# Altium PCB KeypadPCB.PcbDoc
Units mil, origin at the board's own origin, x right, y up, seen from the top; angles counter-clockwise.
Board outline 5000 x 3000 mil, 2 copper layers (Top Layer, Bottom Layer); 148 components, 80 nets, 508 pads, 47 vias.
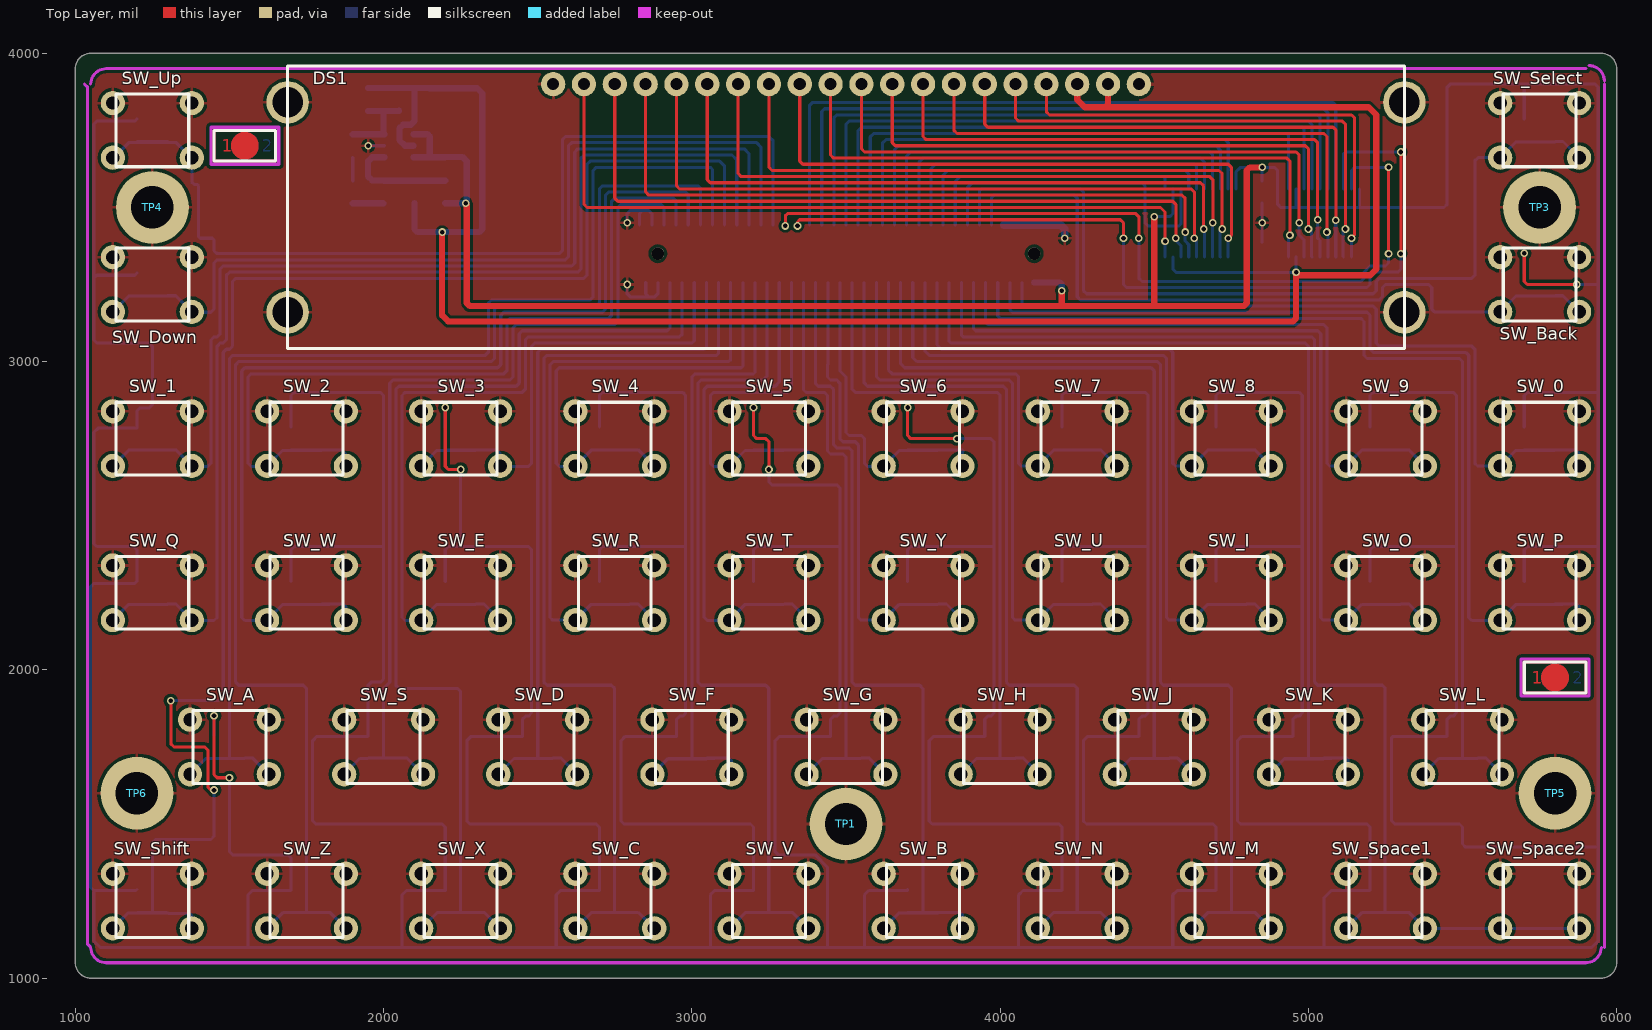
[diagram p0: Top Layer view]
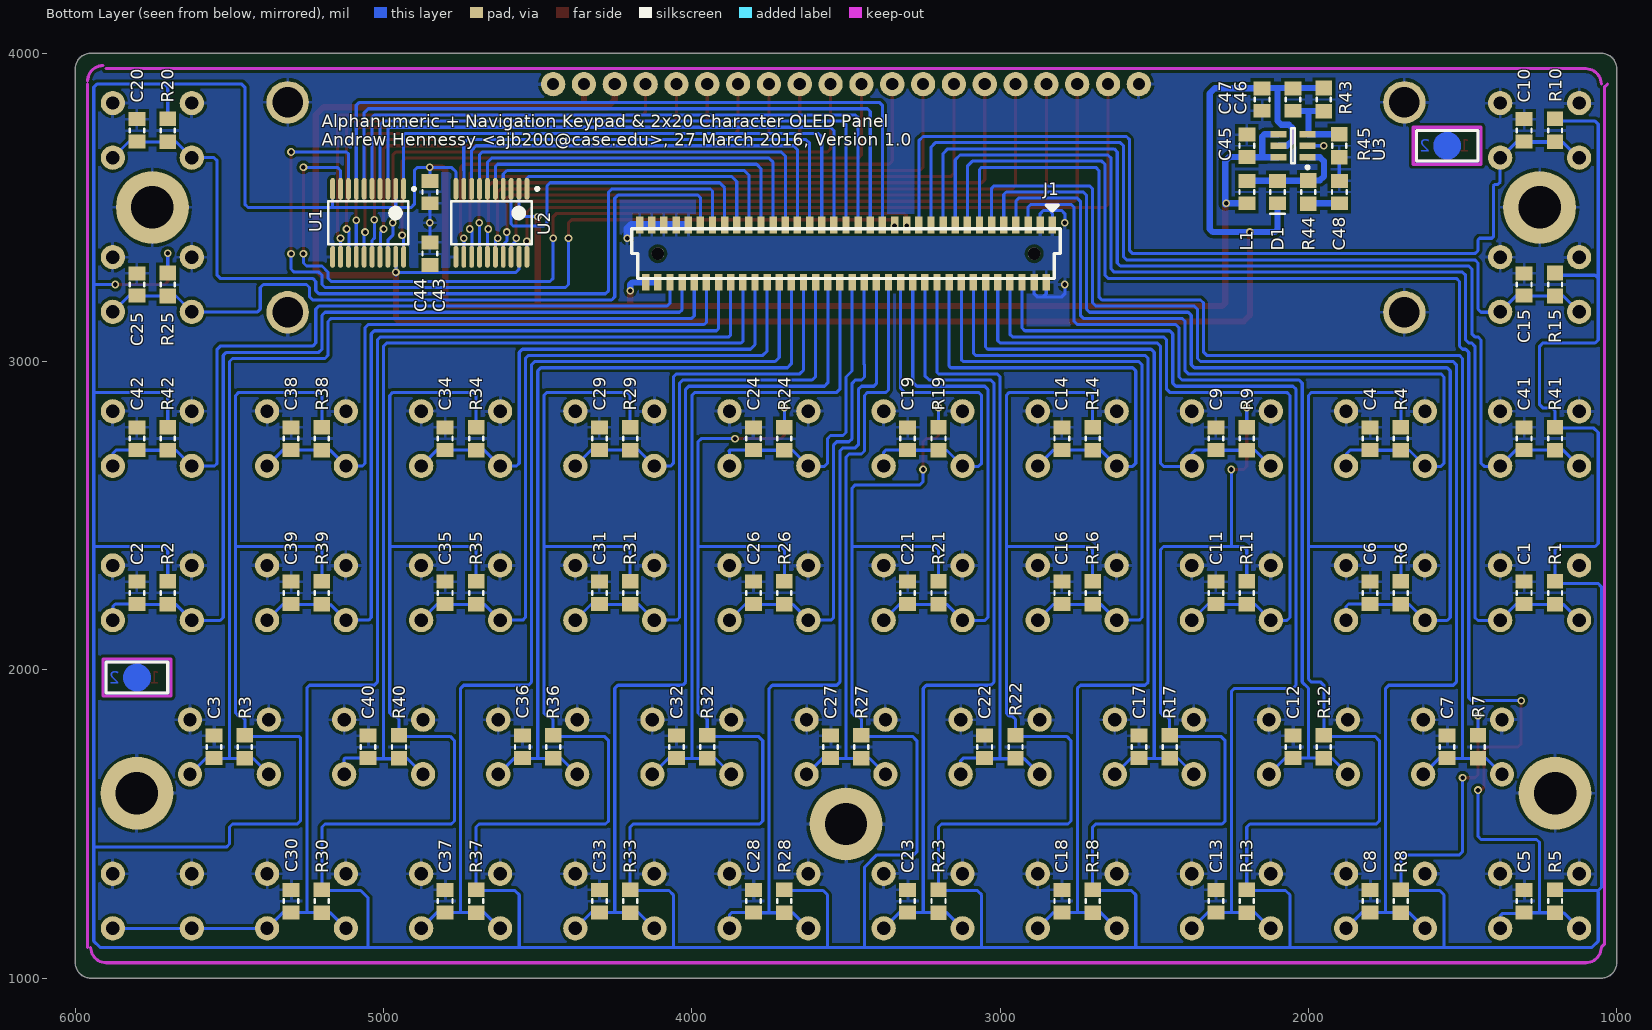
[diagram p1: Bottom Layer view, seen from below]

## Layer stack, top to bottom
Top Solder: solder mask 0.4, Solder Resist, Dk 3.5
Top Layer: signal copper 1.4
Dielectric 1: dielectric 12.6, FR-4, Dk 4.8
Bottom Layer: signal copper 1.4
Bottom Solder: solder mask 0.4, Solder Resist, Dk 3.5

## Board outline
1050,1000 cw(c1050,1050) 1000,1050 1000,3950 cw(c1050,3950) 1050,4000 5950,4000 cw(c5950,3950) 6000,3950 6000,1050 cw(c5950,1050) 5950,1000

## Design rules (kind name [scope] priority, off if disabled: settings)
Clearance [All] p1: gap=10
PolygonConnect [All] p1: connectstyle=Relief reliefconductorwidth=10 reliefentries=4 polygonreliefangle="90 Angle" airgapwidth=10
RoutingVias [All] p1: holewidth=28 width=25 viastyle="Through Hole" minholewidth=15 minwidth=25 maxholewidth=15 maxwidth=50
SolderMaskExpansion [All] p1: expansion=4
Width [All] p1: maxlimit=30 minlimit=8 preferedwidth=10 minimp=50.000000 maximp=50.000000 favimp=50.000000
30 further rules are at their usual default settings.

## Components (designator, comment, footprint, x,y, rotation, side; value= is the part's Value field where it differs from the comment)
C1 "1µF" C0805(2012)_NP_med 1300,2250 r270 bottom
C2 "1µF" C0805(2012)_NP_med 5800,2250 r270 bottom
C3 "1µF" C0805(2012)_NP_med 5550,1750 r270 bottom
C4 "1µF" C0805(2012)_NP_med 1800,2750 r270 bottom
C5 "1µF" C0805(2012)_NP_med 1300,1250 r90 bottom
C6 "1µF" C0805(2012)_NP_med 1800,2250 r270 bottom
C7 "1µF" C0805(2012)_NP_med 1550,1750 r270 bottom
C8 "1µF" C0805(2012)_NP_med 1800,1250 r270 bottom
C9 "1µF" C0805(2012)_NP_med 2300,2750 r270 bottom
C10 "1µF" C0805(2012)_NP_med 1300,3750 r270 bottom
C11 "1µF" C0805(2012)_NP_med 2300,2250 r270 bottom
C12 "1µF" C0805(2012)_NP_med 2050,1750 r270 bottom
C13 "1µF" C0805(2012)_NP_med 2300,1250 r270 bottom
C14 "1µF" C0805(2012)_NP_med 2800,2750 r270 bottom
C15 "1µF" C0805(2012)_NP_med 1300,3250 r270 bottom
C16 "1µF" C0805(2012)_NP_med 2800,2250 r270 bottom
C17 "1µF" C0805(2012)_NP_med 2550,1750 r270 bottom
C18 "1µF" C0805(2012)_NP_med 2800,1250 r270 bottom
C19 "1µF" C0805(2012)_NP_med 3300,2750 r270 bottom
C20 "1µF" C0805(2012)_NP_med 5800,3750 r270 bottom
C21 "1µF" C0805(2012)_NP_med 3300,2250 r270 bottom
C22 "1µF" C0805(2012)_NP_med 3050,1750 r270 bottom
C23 "1µF" C0805(2012)_NP_med 3300,1250 r270 bottom
C24 "1µF" C0805(2012)_NP_med 3800,2750 r270 bottom
C25 "1µF" C0805(2012)_NP_med 5800,3250 r270 bottom
C26 "1µF" C0805(2012)_NP_med 3800,2250 r270 bottom
C27 "1µF" C0805(2012)_NP_med 3550,1750 r270 bottom
C28 "1µF" C0805(2012)_NP_med 3800,1250 r270 bottom
C29 "1µF" C0805(2012)_NP_med 4300,2750 r270 bottom
C30 "1µF" C0805(2012)_NP_med 5300,1250 r90 bottom
C31 "1µF" C0805(2012)_NP_med 4300,2250 r270 bottom
C32 "1µF" C0805(2012)_NP_med 4050,1750 r270 bottom
C33 "1µF" C0805(2012)_NP_med 4300,1250 r270 bottom
C34 "1µF" C0805(2012)_NP_med 4800,2750 r270 bottom
C35 "1µF" C0805(2012)_NP_med 4800,2250 r270 bottom
C36 "1µF" C0805(2012)_NP_med 4550,1750 r270 bottom
C37 "1µF" C0805(2012)_NP_med 4800,1250 r270 bottom
C38 "1µF" C0805(2012)_NP_med 5300,2750 r270 bottom
C39 "1µF" C0805(2012)_NP_med 5300,2250 r270 bottom
C40 "1µF" C0805(2012)_NP_med 5050,1750 r270 bottom
C41 "1µF" C0805(2012)_NP_med 1300,2750 r270 bottom
C42 "1µF" C0805(2012)_NP_med 5800,2750 r270 bottom
C43 "0.1µF" C0805(2012)_NP_med 4850,3550 r270 bottom
C44 "0.1µF" C0805(2012)_NP_med 4850,3350 r90 bottom
C45 "4.7µF" C0805(2012)_NP_med 2200,3700 r90 bottom
C46 "100pF" C0805(2012)_NP_med 2050,3850 r270 bottom
C47 "4.7µF" C0805(2012)_NP_med 2150,3850 r270 bottom
C48 "1nF" C0805(2012)_NP_med 1900,3550 r270 bottom
D1 "SD0805S020S1R0" C0805(2012)_P_med 2100,3550 r90 bottom
DS1 "NHD-0220CW-AG3" "Newhaven NHD-0220CW-AG3" 3500,3900 r0 top locked
J1 "BKS-169-01-L-V-A" "SAMTEC BKS-169-01-L-V-A" 3500,3350 r0 bottom locked
L1 "4.7µH" C0805(2012)_NP_med 2200,3550 r90 bottom
R1 "10kΩ" R0805(2012)_med 1200,2250 r270 bottom
R2 "10kΩ" R0805(2012)_med 5700,2250 r270 bottom
R3 "10kΩ" R0805(2012)_med 5450,1750 r270 bottom
R4 "10kΩ" R0805(2012)_med 1700,2750 r270 bottom
R5 "10kΩ" R0805(2012)_med 1200,1250 r90 bottom
R6 "10kΩ" R0805(2012)_med 1700,2250 r270 bottom
R7 "10kΩ" R0805(2012)_med 1450,1750 r270 bottom
R8 "10kΩ" R0805(2012)_med 1700,1250 r270 bottom
R9 "10kΩ" R0805(2012)_med 2200,2750 r270 bottom
R10 "10kΩ" R0805(2012)_med 1200,3750 r270 bottom
R11 "10kΩ" R0805(2012)_med 2200,2250 r270 bottom
R12 "10kΩ" R0805(2012)_med 1950,1750 r270 bottom
R13 "10kΩ" R0805(2012)_med 2200,1250 r270 bottom
R14 "10kΩ" R0805(2012)_med 2700,2750 r270 bottom
R15 "10kΩ" R0805(2012)_med 1200,3250 r270 bottom
R16 "10kΩ" R0805(2012)_med 2700,2250 r270 bottom
R17 "10kΩ" R0805(2012)_med 2450,1750 r270 bottom
R18 "10kΩ" R0805(2012)_med 2700,1250 r270 bottom
R19 "10kΩ" R0805(2012)_med 3200,2750 r270 bottom
R20 "10kΩ" R0805(2012)_med 5700,3750 r270 bottom
R21 "10kΩ" R0805(2012)_med 3200,2250 r270 bottom
R22 "10kΩ" R0805(2012)_med 2950,1750 r270 bottom
R23 "10kΩ" R0805(2012)_med 3200,1250 r270 bottom
R24 "10kΩ" R0805(2012)_med 3700,2750 r270 bottom
R25 "10kΩ" R0805(2012)_med 5700,3250 r270 bottom
R26 "10kΩ" R0805(2012)_med 3700,2250 r270 bottom
R27 "10kΩ" R0805(2012)_med 3450,1750 r270 bottom
R28 "10kΩ" R0805(2012)_med 3700,1250 r270 bottom
R29 "10kΩ" R0805(2012)_med 4200,2750 r270 bottom
R30 "10kΩ" R0805(2012)_med 5200,1250 r270 bottom
R31 "10kΩ" R0805(2012)_med 4200,2250 r270 bottom
R32 "10kΩ" R0805(2012)_med 3950,1750 r270 bottom
R33 "10kΩ" R0805(2012)_med 4200,1250 r270 bottom
R34 "10kΩ" R0805(2012)_med 4700,2750 r270 bottom
R35 "10kΩ" R0805(2012)_med 4700,2250 r270 bottom
R36 "10kΩ" R0805(2012)_med 4450,1750 r270 bottom
R37 "10kΩ" R0805(2012)_med 4700,1250 r270 bottom
R38 "10kΩ" R0805(2012)_med 5200,2750 r270 bottom
R39 "10kΩ" R0805(2012)_med 5200,2250 r270 bottom
R40 "10kΩ" R0805(2012)_med 4950,1750 r270 bottom
R41 "10kΩ" R0805(2012)_med 1200,2750 r270 bottom
R42 "10kΩ" R0805(2012)_med 5700,2750 r270 bottom
R43 "1.02MΩ" R0805(2012)_med 1950,3850 r270 bottom
R44 "2Ω" R0805(2012)_med 2000,3550 r270 bottom
R45 "332kΩ" R0805(2012)_med 1900,3700 r270 bottom
SW_0 "TE 1825910-6" "TE 1825910-6" 5750,2750 r0 top locked
SW_1 "1825910-6" "TE 1825910-6" 1250,2750 r0 top locked
SW_2 "1825910-6" "TE 1825910-6" 1750,2750 r0 top locked
SW_3 "1825910-6" "TE 1825910-6" 2250,2750 r0 top locked
SW_4 "1825910-6" "TE 1825910-6" 2750,2750 r0 top locked
SW_5 "1825910-6" "TE 1825910-6" 3250,2750 r0 top locked
SW_6 "1825910-6" "TE 1825910-6" 3750,2750 r0 top locked
SW_7 "1825910-6" "TE 1825910-6" 4250,2750 r0 top locked
SW_8 "1825910-6" "TE 1825910-6" 4750,2750 r0 top locked
SW_9 "1825910-6" "TE 1825910-6" 5250,2750 r0 top locked
SW_A "1825910-6" "TE 1825910-6" 1500,1750 r0 top locked
SW_B "1825910-6" "TE 1825910-6" 3750,1250 r0 top locked
SW_Back "1825910-6" "TE 1825910-6" 5750,3250 r0 top locked
SW_C "1825910-6" "TE 1825910-6" 2750,1250 r0 top locked
SW_D "1825910-6" "TE 1825910-6" 2500,1750 r0 top locked
SW_Down "1825910-6" "TE 1825910-6" 1250,3250 r0 top locked
SW_E "1825910-6" "TE 1825910-6" 2250,2250 r0 top locked
SW_F "1825910-6" "TE 1825910-6" 3000,1750 r0 top locked
SW_G "1825910-6" "TE 1825910-6" 3500,1750 r0 top locked
SW_H "1825910-6" "TE 1825910-6" 4000,1750 r0 top locked
SW_I "1825910-6" "TE 1825910-6" 4750,2250 r0 top locked
SW_J "1825910-6" "TE 1825910-6" 4500,1750 r0 top locked
SW_K "1825910-6" "TE 1825910-6" 5000,1750 r0 top locked
SW_L "1825910-6" "TE 1825910-6" 5500,1750 r0 top locked
SW_M "1825910-6" "TE 1825910-6" 4750,1250 r0 top locked
SW_N "1825910-6" "TE 1825910-6" 4250,1250 r0 top locked
SW_O "1825910-6" "TE 1825910-6" 5250,2250 r0 top locked
SW_P "1825910-6" "TE 1825910-6" 5750,2250 r0 top locked
SW_Q "1825910-6" "TE 1825910-6" 1250,2250 r0 top locked
SW_R "1825910-6" "TE 1825910-6" 2750,2250 r0 top locked
SW_S "1825910-6" "TE 1825910-6" 2000,1750 r0 top locked
SW_Select "1825910-6" "TE 1825910-6" 5750,3750 r0 top locked
SW_Shift "1825910-6" "TE 1825910-6" 1250,1250 r0 top locked
SW_Space1 "1825910-6" "TE 1825910-6" 5250,1250 r0 top locked
SW_Space2 "1825910-6" "TE 1825910-6" 5750,1250 r0 top locked
SW_T "1825910-6" "TE 1825910-6" 3250,2250 r0 top locked
SW_U "1825910-6" "TE 1825910-6" 4250,2250 r0 top locked
SW_Up "1825910-6" "TE 1825910-6" 1250,3750 r0 top locked
SW_V "1825910-6" "TE 1825910-6" 3250,1250 r0 top locked
SW_W "1825910-6" "TE 1825910-6" 1750,2250 r0 top locked
SW_X "1825910-6" "TE 1825910-6" 2250,1250 r0 top locked
SW_Y "1825910-6" "TE 1825910-6" 3750,2250 r0 top locked
SW_Z "1825910-6" "TE 1825910-6" 1750,1250 r0 top locked
TP1 "Testpoint" "M3x0.5 Hole" 3500,1500 r0 top
TP3 "Testpoint" "M3x0.5 Hole" 5750,3500 r0 top
TP4 "Testpoint" "M3x0.5 Hole" 1250,3500 r0 top
TP5 "Testpoint" "M3x0.5 Hole" 5800,1600 r0 top
TP6 "Testpoint" "M3x0.5 Hole" 1200,1600 r0 top
U1 "TXB0108PWR" "TI 20 Pin PW (R-PDSO-G20)" 5050,3450 r270 bottom locked
U2 "TXB0108PWR" "TI 20 Pin PW (R-PDSO-G20)" 4650,3450 r270 bottom locked
U3 "LTC3400BES6#TRMPBF" LT-S6-6-TSOT-23_N 2050,3700 r0 bottom

## Footprints (in the part's own frame and the unit in brackets; to place one, negate y for a bottom-side part, rotate by r counter-clockwise, add the part's x,y. Pads: shape width x height; smd on the part's side, far side on the other; paste and mask are expansions set on the pad)
C0805(2012)_NP_med [mm] "Chip Capacitor, 2-Leads, Body 2.0x1.3mm, IPC Medium Density"
  rect 1.15x1.4 smd: 1(-0.925,0) 2(0.925,0)
  silkscreen extent -0.15,-0.6 0.15,0.6, body extent -1.1,-0.67 1.1,0.67, height 0.7
C0805(2012)_P_med [mm] "Chip Capacitor, 2-Leads, Body 2.0x1.3mm, IPC Medium Density"
  rect 1.15x1.4 smd: 1(-0.925,0) 2(0.925,0)
  silkscreen extent -1.8,-0.6 0.15,0.6, body extent -1.1,-0.67 1.1,0.67, height 0.7
LT-S6-6-TSOT-23_N [mm] "SOT23, 6-Leads, Body 2.9x1.75mm, Pitch 0.95mm, IPC Medium Density"
  rect 1.3x0.55 smd: 1(-1.2,0.95) 2(-1.2,0) 3(-1.2,-0.95) 4(1.2,-0.95) 5(1.2,0) 6(1.2,0.95)
  silkscreen extent -1.32,-1.45 0.15,1.9, body extent -0.87,-1.45 0.87,1.45, height 1
"M3x0.5 Hole" [mm] "A hole"
  round 6 hole 3.5: 1(0,0)
"Newhaven NHD-0220CW-AG3" [mm] "Slim Character OLED. 2 lines x 20 character Green OLED display. 2.8V or 5V power. 4/8-bit Parallel, SPI, or I2C MPU interface. 3 built-in font tables. Double height characters."
  round 2 hole 1: 1(24.13,0) 2(21.59,0) 3(19.05,0) 4(16.51,0) 5(13.97,0) 6(11.43,0) 7(8.89,0) 8(6.35,0) 9(3.81,0) 10(1.27,0) 11(-1.27,0) 12(-3.81,0) 13(-6.35,0) 14(-8.89,0) 15(-11.43,0) 16(-13.97,0) 17(-16.51,0) 18(-19.05,0) 19(-21.59,0) 20(-24.13,0)
  round 3.5 hole 2.5: MH1(-46,-1.5) MH2(46,-1.5) MH3(-46,-18.8) MH4(46,-18.8)
  silkscreen extent -46,-21.8 46,1.5, body extent -45.72,-21.59 45.72,1.27, height 10
R0805(2012)_med [mm] "Chip Resistor, 2-Leads, Body 2.0x1.3mm, IPC Medium Density"
  rect 1.2x1.35 smd: 1(-0.95,0) 2(0.95,0)
  silkscreen extent -0.15,-0.58 0.15,0.58, body extent -1.1,-0.67 1.1,0.67, height 0.7
"SAMTEC BKS-169-01-L-V-A" [mm] "Polarized Micro Socket"
  rect 0.61x1.375 smd: 1(-17,-2.362) 2(-16.5,2.362) 3(-16,-2.362) 4(-15.5,2.362) 5(-15,-2.362) 6(-14.5,2.362) 7(-14,-2.362) 8(-13.5,2.362) 9(-13,-2.362) 10(-12.5,2.362) 11(-12,-2.362) 12(-11.5,2.362) 13(-11,-2.362) 14(-10.5,2.362) 15(-10,-2.362) 16(-9.5,2.362) 17(-9,-2.362) 18(-8.5,2.362) 19(-8,-2.362) 20(-7.5,2.362) 21(-7,-2.362) 22(-6.5,2.362) 23(-6,-2.362) 24(-5.5,2.362) 25(-5,-2.362) 26(-4.5,2.362) 27(-4,-2.362) 28(-3.5,2.362) 29(-3,-2.362) 30(-2.5,2.362) 31(-2,-2.362) 32(-1.5,2.362) 33(-1,-2.362) 34(-0.5,2.362) 35(0,-2.362) 36(0.5,2.362) 37(1,-2.362) 38(1.5,2.362) 39(2,-2.362) 40(2.5,2.362) 41(3,-2.362) 42(3.5,2.362) 43(4,-2.362) 44(4.5,2.362) 45(5,-2.362) 46(5.5,2.362) 47(6,-2.362) 48(6.5,2.362) 49(7,-2.362) 50(7.5,2.362) 51(8,-2.362) 52(8.5,2.362) 53(9,-2.362) 54(9.5,2.362) 55(10,-2.362) 56(10.5,2.362) 57(11,-2.362) 58(11.5,2.362) 59(12,-2.362) 60(12.5,2.362) 61(13,-2.362) 62(13.5,2.362) 63(14,-2.362) 64(14.5,2.362) 65(15,-2.362) 66(15.5,2.362) 67(16,-2.362) 68(16.5,2.362) 69(17,-2.362)
  round 1.02 hole 1.02 unplated: AH1(-15.5,0) AH2(15.5,0)
  silkscreen extent -17.65,-4 17.65,2.05, body extent -17.67,-2.79 17.67,2.79, height 2.22
"TE 1825910-6" [mm] "SWITCH TACTILE SPST-NO 0.05A 24V"
  round 2 hole 1.1: 1(-3.25,2.25) 2(3.25,2.25) 3(-3.25,-2.25) 4(3.25,-2.25)
  silkscreen extent -3,-3 3,3, body extent -3.05,-3.05 3.05,3, height 4.98
"TI 20 Pin PW (R-PDSO-G20)" [mm] "Texas Instruments 20 Pin PW Package (0.65mm pitch, 4.4mm width,"
  oval 1.8x0.4 smd: 1(-2.8,2.921) 2(-2.8,2.271) 3(-2.8,1.621) 4(-2.8,0.971) 5(-2.8,0.321) 6(-2.8,-0.329) 7(-2.8,-0.979) 8(-2.8,-1.629) 9(-2.8,-2.279) 10(-2.8,-2.929) 11(2.8,-2.929) 12(2.8,-2.279) 13(2.8,-1.629) 14(2.8,-0.979) 15(2.8,-0.329) 16(2.8,0.321) 17(2.8,0.971) 18(2.8,1.621) 19(2.8,2.271) 20(2.8,2.921)
  silkscreen extent -2.92,-3.3 1.78,3.9, body extent -2.21,-3.25 2.21,3.25, height 1.2

## Part data
C1 C2 C3 C4 C5 C6 C7 C8 C9 C10 C11 C12 C13 C14 C15 C16 C17 C18 C19 C20 C21 C22 C23 C24 C25 C26 C27 C28 C29 C30 C31 C32 C33 C34 C35 C36 C37 C38 C39 C40 C41 C42 C43 C44 C45 C46 C47 C48: library part CPN_SMT, "SMT Capacitor"
D1: library part DIODE_sMT, "SMT LED"
DS1: library part "NewHaven NHD-0220CW-AG3", "Slim Character OLED. 2 lines x 20 character Green OLED display. 2.8V or 5V power. 4/8-bit Parallel, SPI, or I2C MPU interface. 3 built-in font tables. Double height characters."
J1: library part "Samtec BKS-169-01-L-V-A", "CONN HDR 69POS 1MM SMD GLD"
L1: library part IND_SMT, "SMT Inductor"
R1 R2 R3 R4 R5 R6 R7 R8 R9 R10 R11 R12 R13 R14 R15 R16 R17 R18 R19 R20 R21 R22 R23 R24 R25 R26 R27 R28 R29 R30 R31 R32 R33 R34 R35 R36 R37 R38 R39 R40 R41 R42 R43 R44 R45: library part RES_SMT, "SMT resistor"
SW_0 SW_1 SW_2 SW_3 SW_4 SW_5 SW_6 SW_7 SW_8 SW_9 SW_A SW_B SW_Back SW_C SW_D SW_Down SW_E SW_F SW_G SW_H SW_I SW_J SW_K SW_L SW_M SW_N SW_O SW_P SW_Q SW_R SW_S SW_Select SW_Shift SW_Space1 SW_Space2 SW_T SW_U SW_Up SW_V SW_W SW_X SW_Y SW_Z: "SWITCH TACTILE SPST-NO 0.05A 24V"
U1 U2: library part "TI TXB0108PWR", "IC 8-BIT TRNSTR 15KV ESD 20TSSOP"
U3: "600 mA, 1.2 MHz Micropower Synchronous Boost Converter, 6-pin SOT23 (S6-6), -30 to 85 degC, Pb-Free, Mini Tape and Reel"

## Via types
v1: diameter 25, hole 15, Top Layer to Bottom Layer, tented both sides, 47 vias

## Nets (pads, with @x,y where several pads share a name; then routed paths per layer and width w, separated by ;. In a path a pad name is that pad's centre, name@x,y a point inside that pad or via, vN(x,y) a via of type N, cw(c..) or ccw(c..) an arc to the next point about the centre after c; other vN are vias at no path point)
+3V3: C43.1 C45.1 J1.66 J1.68 L1.1 R1.1 R2.1 R3.1 R4.1 R5.2 R6.1 R7.1 R8.1 R9.1 R10.1 R11.1 R12.1 R13.1 R14.1 R15.1 R16.1 R17.1 R18.1 R19.1 R20.1 R21.1 R22.1 R23.1 R24.1 R25.1 R26.1 R27.1 R28.1 R29.1 R30.1 R31.1 R32.1 R33.1 R34.1 R35.1 R36.1 R37.1 R38.1 R39.1 R40.1 R41.1 R42.1 U1.2 U1.10 U2.2 U2.10 U3.4 U3.6 | length 45803.9
  Top Layer w10: v1(1450,1850.98) 1450,1660 1460,1650 v1(1500,1650) ; v1(2200,2850.98) 2200,2660 2210,2650 v1(2250,2650) ; v1(3200,2850.98) 3200,2760 3210,2750 3240,2750 3250,2740 v1(3250,2650) ; v1(3700,2850.98) 3700,2760 3710,2750 v1(3860,2750) ; v1(5700,3350.98) 5700,3260 5710,3250 v1(5870,3250)
  Top Layer w20: v1@2270,3510 2270,3190 2280,3180 4200,3180 ; v1(4200,3230) 4200,3180 ; v1(4500,3470) 4500,3180 ; v1(4850,3630) 4810,3630 4800,3620 4800,3190 4790,3180 4500,3180 ; 4200,3180 4500,3180
  Bottom Layer w10: 1060,1280 1060,1120 1080,1100 1560,1100 ; R5.2 1196.81,1284.21 1060,1284.21 1050,1294.21 1050,2270 1060,2280 1192.6,2280 R1.1 1200,2390 1190,2400 1070,2400 1060,2410 1060,2770 1074.21,2784.21 1200,2784.21 R41.1 1200,2840 1210,2850 1240,2850 1250,2860 1250,3050 1240,3060 1070,3060 1060,3070 1060,3270 ; R15.1 1192.6,3280 1070,3280 1060,3270 ; R10.1 1192.6,3780 1070,3780 1060,3770 1060,3270 ; R7.1 v1(1450,1850.98) ; v1(1500,1650) 1500,1410 1510,1400 1690,1400 1700,1390 R8.1 1700,1284.21 1574.21,1284.21 1560,1270 1560,1100 ; R6.1 1700,2390 1710,2400 2000,2400 ; R4.1 1700,2890 1710,2900 1990,2900 2000,2890 2000,2400 ; R11.1 2200,2390 2210,2400 2250,2400 ; R9.1 v1(2200,2850.98) ; v1(2250,2650) 2250,2400 ; R16.1 2700,2390 2710,2400 2980,2400 ; R14.1 2700,2890 2710,2900 2970,2900 2980,2890 2980,2400 ; R21.1 3200,2390 3210,2400 3480,2400 ; R19.1 v1(3200,2850.98) ; v1(3250,2650) 3250,2610 3260,2600 3470,2600 3480,2590 3480,2400 ; R28.1 3700,1284.21 3574.21,1284.21 3560,1270 3560,1100 ; R26.1 3700,2390 3710,2400 3980,2400 ; R24.1 v1(3700,2850.98) ; v1(3860,2750) 3970,2750 3980,2740 3980,2400 ; R31.1 4200,2390 4210,2400 4480,2400 ; R29.1 4200,2890 4210,2900 4470,2900 4480,2890 4480,2400 ; v1(4500,3470) 4550,3470 4560.59,3480.59 U2.2 ; R35.1 4700,2390 4710,2400 4980,2400 ; R34.1 4700,2890 4710,2900 4970,2900 4980,2890 4980,2400 ; U2.10 4765.32,3615.32 4780,3630 v1(4850,3630) ; C43.1 v1(4850,3630) ; U1.2 4960.59,3500.59 4960,3500 ; U1.10 5165.32,3504.68 5170,3500 ; R39.1 5200,2390 5210,2400 5480,2400 ; R38.1 5200,2890 5210,2900 5470,2900 5480,2890 5480,2400 ; R2.1 5700,2390 5710,2400 5940,2400 ; R42.1 5700,2890 5710,2900 5940,2900 ; R25.1 v1(5700,3350.98) ; R20.1 5700,3890 5710,3900 ; v1(5870,3250) 5940,3250 ; 1560,1100 2060,1100 ; 2000,2400 2000,1970 1990,1960 1960,1960 1950,1950 R12.1 1950,1784.21 1784.21,1784.21 1770,1770 1770,1510 1780,1500 2190,1500 2200,1490 R13.1 2200,1284.21 2074.21,1284.21 2060,1270 2060,1100 ; 2060,1100 2560,1100 ; 2250,2400 2470,2400 2480,2390 2480,1860 2470,1850 2460.49,1850 2450,1839.51 R17.1 2450,1784.21 2284.21,1784.21 2270,1770 2270,1510 2280,1500 2690,1500 2700,1490 R18.1 2700,1284.21 2574.21,1284.21 2560,1270 2560,1100 ; 2560,1100 3060,1100 ; 2980,2400 2980,1860 2970,1850 2960.49,1850 2950,1839.51 R22.1 2950,1784.21 2784.21,1784.21 2770,1770 2770,1510 2780,1500 3190,1500 3200,1490 R23.1 3200,1284.21 3074.21,1284.21 3060,1270 3060,1100 ; 3060,1100 3440,1100 ; 3440,1100 3560,1100 ; 3440,1100 3440,1360 3400,1400 3280,1400 3270,1410 3270,1770 3284.21,1784.21 3450,1784.21 R27.1 3450,1840 3460,1850 3470,1850 3480,1860 3480,2400 ; 3560,1100 4060,1100 ; 3980,2400 3980,1860 3970,1850 3960,1850 3950,1840 R32.1 3950,1784.21 3784.21,1784.21 3770,1770 3770,1510 3780,1500 4190,1500 4200,1490 R33.1 4200,1284.21 4074.21,1284.21 4060,1270 4060,1100 ; 4060,1100 4560,1100 ; 4480,2400 4480,1860 4470,1850 4460.49,1850 4450,1839.51 R36.1 4450,1784.21 4284.21,1784.21 4270,1770 4270,1510 4280,1500 4690,1500 4700,1490 R37.1 4700,1284.21 4574.21,1284.21 4560,1270 4560,1100 ; 4560,1100 5050,1100 ; v1(4850,3630) 4890,3630 4900,3620 4900,3510 4910,3500 4960,3500 ; 4960,3500 5170,3500 ; 4980,2400 4980,1860 4970,1850 4960,1850 4950,1840 R40.1 4950,1784.21 4784.21,1784.21 4770,1770 4770,1510 4780,1500 5190,1500 5200,1490 R30.1 5200,1284.21 5074.21,1284.21 5050,1260 5050,1100 ; 5050,1100 5920,1100 5940,1120 5940,1425 ; 5170,3500 5440,3500 5450,3510 5450,3890 5460,3900 5710,3900 ; 5480,2400 5480,1860 5470,1850 5460,1850 5450,1840 R3.1 5450,1784.21 5274.21,1784.21 5270,1780 5270,1510 5280,1500 5490,1500 5500,1490 5500,1435 5510,1425 5940,1425 ; 5710,3900 5930,3900 5940,3890 5940,3250 ; 5940,1425 5940,2400 ; 5940,2400 5940,2900 ; 5940,2900 5940,3250
  Bottom Layer w20: U3.6 2148.13,3662.6 ; U3.4 2142.6,3737.4 2150,3730 2150,3664.47 2148.13,3662.6 ; L1.1 v1(2266.42,3513.58) 2270,3510 2270,3650 2256.42,3663.58 C45.1 2199.02,3662.6 2148.13,3662.6 ; J1.66 4193.01,3256.99 4200,3250 v1(4200,3230)
+5V: C44.1 C46.1 C47.1 D1.1 DS1.2 DS1.3 R43.1 U1.19 U2.19 U3.5 | length 6974.3
  Top Layer w20: v1(2190,3420) 2190,3150 2210,3130 4950,3130 4960,3140 4960,3280 5200,3280 5220,3300 5220,3800 5195,3825 4340,3825 ; DS1.3 4250,3850 4275,3825 4340,3825 ; DS1.2 4350,3835 4340,3825
  Bottom Layer w10: U2.19 4560.59,3299.41 4570.67,3289.33 4950.67,3289.33 4960,3280 v1(4960,3290) 4960,3339.17 U1.19
  Bottom Layer w20: R43.1 2100,3887.4 ; U3.5 2069.94,3700 2051.65,3718.29 2051.65,3756.51 2063.37,3768.23 2088.23,3768.23 2100,3780 2100,3887.4 ; D1.1 2100,3430 2110,3420 v1(2190,3420) 2310,3420 2320,3430 2320,3870 2303.58,3886.42 C47.1 2149.02,3887.4 2100,3887.4
GND: C1.1 C2.1 C3.1 C4.1 C5.2 C6.1 C7.1 C8.1 C9.1 C10.1 C11.1 C12.1 C13.1 C14.1 C15.1 C16.1 C17.1 C18.1 C19.1 C20.1 C21.1 C22.1 C23.1 C24.1 C25.1 C26.1 C27.1 C28.1 C29.1 C30.2 C31.1 C32.1 C33.1 C34.1 C35.1 C36.1 C37.1 C38.1 C39.1 C40.1 C41.1 C42.1 C43.2 C44.2 C45.2 C47.2 C48.1 DS1.1 DS1.20 DS1.MH1 DS1.MH2 DS1.MH3 DS1.MH4 J1.1 J1.2 J1.3 J1.4 J1.61 J1.63 J1.65 J1.67 J1.69 R45.2 SW_0.1 SW_0.2 SW_1.1 SW_1.2 SW_2.1 SW_2.2 SW_3.1 SW_3.2 SW_4.1 SW_4.2 SW_5.1 SW_5.2 SW_6.1 SW_6.2 SW_7.1 SW_7.2 SW_8.1 SW_8.2 SW_9.1 SW_9.2 SW_A.1 SW_A.2 SW_B.1 SW_B.2 SW_Back.1 SW_Back.2 SW_C.1 SW_C.2 SW_D.1 SW_D.2 SW_Down.1 SW_Down.2 SW_E.1 SW_E.2 SW_F.1 SW_F.2 SW_G.1 SW_G.2 SW_H.1 SW_H.2 SW_I.1 SW_I.2 SW_J.1 SW_J.2 SW_K.1 SW_K.2 SW_L.1 SW_L.2 SW_M.1 SW_M.2 SW_N.1 SW_N.2 SW_O.1 SW_O.2 SW_P.1 SW_P.2 SW_Q.1 SW_Q.2 SW_R.1 SW_R.2 SW_S.1 SW_S.2 SW_Select.1 SW_Select.2 SW_Shift.1 SW_Shift.2 SW_Space1.1 SW_Space1.2 SW_Space2.1 SW_Space2.2 SW_T.1 SW_T.2 SW_U.1 SW_U.2 SW_Up.1 SW_Up.2 SW_V.1 SW_V.2 SW_W.1 SW_W.2 SW_X.1 SW_X.2 SW_Y.1 SW_Y.2 SW_Z.1 SW_Z.2 TP1.1 TP3.1 TP4.1 TP5.1 TP6.1 U1.11 U2.11 U3.2 | length 922.9
  Bottom Layer w10: C48.1 R45.2 ; v1(1950,3700) U3.2 ; v1(2790,3250) 2790,3220 2800,3210 2860,3210 ; v1(2790,3450) 2790,3480 2800,3490 2840,3490 ; J1.1 2830,3443.72 2830,3480 2840,3490 ; J1.2 2850.39,3220.39 2850,3220 2860,3210 ; J1.3 2870.08,3479.92 2860,3490 2840,3490 ; J1.4 2889.76,3219.76 2880,3210 2860,3210 ; C44.2 v1(4850,3450) C43.2
  Bottom Layer w25: J1.61 J1.63 J1.65 J1.67 J1.69 4196.99,3443.01 4210,3430 v1(4210,3400)
KEY_0: C42.2 J1.64 R42.2 SW_0.3 SW_0.4 | length 2565.1
  Bottom Layer w10: J1.64 4070.87,3189.13 4080,3180 5210,3180 5220,3170 5220,3060 5230,3050 5530,3050 5540,3040 5540,2670 5548.58,2661.42 SW_0.3 5672.24,2711.61 R42.2@5699.02,2711.61 ; C42.2@5798.03,2711.61 R42.2@5699.02,2711.61 ; C42.2 5866.42,2713.58 5877.95,2702.05 SW_0.4 ; C42.2@5824.8,2712.6 R42.2 R42.2@5699.02,2711.61
KEY_1: C41.2 J1.19 R41.2 SW_1.3 SW_1.4 | length 3339.8
  Bottom Layer w10: SW_1.3 1173.23,2712.6 R41.2 1299.02,2712.6 C41.2 1325.79,2713.58 SW_1.4 1379.37,2660 1430,2660 1440,2670 1440,3070 1450,3080 1460,3080 1470,3090 1470,3300 1480,3310 2610,3310 2620,3320 2620,3680 2630,3690 3170,3690 3185.04,3674.96 J1.19
KEY_2: C4.2 J1.7 R4.2 SW_2.3 SW_2.4 | length 2788
  Bottom Layer w10: C4.2@1798.03,2711.61 R4.2@1699.02,2711.61 ; C4.2@1800,2712.6 R4.2 R4.2@1699.02,2711.61 ; C4.2 1863.58,2713.58 1877.95,2699.21 SW_2.4 ; J1.7 2948.82,3521.18 2940,3530 2750,3530 2740,3520 2740,3150 2730,3140 2410,3140 2400,3130 2400,2970 2390,2960 1570,2960 1560,2950 1560,2670 1570,2660 1620.63,2660 SW_2.3 1672.24,2711.61 R4.2@1699.02,2711.61
KEY_3: C9.2 J1.10 R9.2 SW_3.3 SW_3.4 | length 1632.3
  Bottom Layer w10: SW_3.3 2172.24,2711.61 R9.2@2199.02,2711.61 ; C9.2@2298.03,2711.61 R9.2@2199.02,2711.61 ; J1.10 3007.87,3067.87 3000,3060 2490,3060 2480,3050 2480,2670 2470,2660 2379.37,2660 SW_3.4 2377.95,2702.05 2367.4,2712.6 R9.2 R9.2@2199.02,2711.61
KEY_4: C14.2 J1.18 R14.2 SW_4.3 SW_4.4 | length 1549.2
  Bottom Layer w10: SW_4.4 2825.79,2713.58 C14.2 2799.02,2712.6 R14.2 2673.23,2712.6 SW_4.3 2620.63,2660 2570,2660 2560,2670 2560,2970 2570,2980 3160,2980 3165.35,2985.35 J1.18
KEY_5: C19.2 J1.26 R19.2 SW_5.3 SW_5.4 | length 1327.8
  Bottom Layer w10: C19.2@3298.03,2711.61 R19.2@3199.02,2711.61 ; J1.26 3322.83,2912.83 3310,2900 3070,2900 3060,2890 3060,2670 3070,2660 3120.63,2660 SW_5.3 3172.24,2711.61 R19.2@3199.02,2711.61 ; SW_5.4 3377.95,2705.63 3370,2713.58 C19.2 3300,2712.6 R19.2 R19.2@3199.02,2711.61
KEY_6: C24.2 J1.34 R24.2 SW_6.3 SW_6.4 | length 1140.3
  Bottom Layer w10: J1.34 3480.32,2969.37 3500,2949.69 3500,2770 3510,2760 3550,2760 3560,2750 3560,2670 3570,2660 3620.63,2660 SW_6.3 3672.24,2711.61 R24.2@3699.02,2711.61 ; C24.2@3798.03,2711.61 R24.2@3699.02,2711.61 ; SW_6.4 3877.95,2707.95 3880,2710 3876.42,2713.58 C24.2 3800,2712.6 R24.2 R24.2@3699.02,2711.61
KEY_7: C29.2 J1.42 R29.2 SW_7.3 SW_7.4 | length 1360.9
  Bottom Layer w10: J1.42 3637.8,2972.2 3650,2960 4050,2960 4060,2950 4060,2670 4068.58,2661.42 SW_7.3 4173.23,2712.6 R29.2 4299.02,2712.6 C29.2 4325.79,2713.58 SW_7.4
KEY_8: C34.2 J1.50 R34.2 SW_8.3 SW_8.4 | length 1701.9
  Bottom Layer w10: J1.50 3795.28,3054.72 3810,3040 4550,3040 4560,3030 4560,2670 4568.58,2661.42 SW_8.3 4673.23,2712.6 R34.2 4799.02,2712.6 C34.2 4825.79,2713.58 SW_8.4
KEY_9: C38.2 J1.58 R38.2 SW_9.3 SW_9.4 | length 2048.9
  Bottom Layer w10: J1.58 3952.76,3127.24 3960,3120 5050,3120 5060,3110 5060,2670 5068.58,2661.42 SW_9.3 5173.23,2712.6 R38.2 5299.02,2712.6 C38.2 5325.79,2713.58 SW_9.4
KEY_A: C7.2 J1.13 R7.2 SW_A.3 SW_A.4 | length 3937.1
  Bottom Layer w10: SW_A.3 1423.23,1712.6 R7.2 1500,1712.6 ; SW_A.4 1575.79,1713.58 C7.2 1549.02,1712.6 1500,1712.6 ; J1.13 3066.93,3623.07 3060,3630 2690,3630 2680,3620 2680,3210 2670,3200 2350,3200 2340,3190 2340,3030 2330,3020 1510,3020 1500,3010 1500,1712.6
KEY_B: C28.2 J1.30 R28.2 SW_B.3 SW_B.4 | length 2807.4
  Bottom Layer w10: J1.30 3401.57,2928.43 3410,2920 3450,2920 3460,2910 3460,2730 3470,2720 3510,2720 3520,2710 3520,1960 3530,1950 3739.02,1950 3750,1939.02 3750,1212.6 ; SW_B.3 3672.24,1211.61 R28.2@3699.02,1211.61 ; C28.2@3798.03,1211.61 3750,1211.61 ; C28.2 3870,1213.58 3877.95,1205.63 SW_B.4 ; C28.2@3824.8,1212.6 3750,1212.6 ; R28.2@3699.02,1211.61 3750,1211.61 ; R28.2@3699.02,1211.61 R28.2 3750,1212.6 ; 3750,1211.61 3750,1212.6
KEY_BACK: C25.2 J1.59 R25.2 SW_Back.3 SW_Back.4 | length 2485.6
  Bottom Layer w10: J1.59 3972.44,3532.44 3980,3540 4240,3540 4250,3530 4250,3210 4260,3200 5230,3200 5240,3210 5240,3240 5250,3250 5390,3250 5400,3240 5400,3170 5408.58,3161.42 SW_Back.3 5673.23,3212.6 R25.2 5799.02,3212.6 C25.2 5825.79,3213.58 SW_Back.4
KEY_C: C18.2 J1.14 R18.2 SW_C.3 SW_C.4 | length 3118.2
  Bottom Layer w10: SW_C.3 2673.23,1212.6 R18.2 2749.51,1212.6 ; SW_C.4 2825.79,1213.58 C18.2 2799.02,1212.6 2749.51,1212.6 ; J1.14 3086.61,3026.61 3080,3020 2530,3020 2520,3010 2520,1960 2530,1950 2739.51,1950 2749.51,1940 2749.51,1212.6
KEY_D: C17.2 J1.12 R17.2 SW_D.3 SW_D.4 | length 2380.7
  Bottom Layer w10: SW_D.3 2423.23,1712.6 R17.2 2500,1712.6 ; SW_D.4 2575.79,1713.58 C17.2 2549.02,1712.6 2500,1712.6 ; J1.12 3047.24,3047.24 3040,3040 2510,3040 2500,3030 2500,1712.6
KEY_DOWN: C15.2 J1.21 R15.2 SW_Down.3 SW_Down.4 | length 2931.3
  Bottom Layer w10: SW_Down.3 1173.23,3212.6 R15.2 1299.02,3212.6 C15.2 1325.79,3213.58 SW_Down.4 1379.37,3160 1440,3160 1450,3170 1450,3320 1460,3330 2590,3330 2600,3340 2600,3700 2610,3710 3210,3710 3224.41,3695.59 J1.21
KEY_E: C11.2 J1.8 R11.2 SW_E.3 SW_E.4 | length 2338.8
  Bottom Layer w10: SW_E.4 2325.79,2213.58 C11.2 2299.02,2212.6 R11.2 2173.23,2212.6 SW_E.3 2120.63,2160 2070,2160 2060,2170 2060,2890 2070,2900 2450,2900 2460,2910 2460,3070 2470,3080 2960,3080 2968.5,3088.5 J1.8
KEY_F: C22.2 J1.20 R22.2 SW_F.3 SW_F.4 | length 2188.9
  Bottom Layer w10: SW_F.3 2922.24,1711.61 R22.2@2949.02,1711.61 ; C22.2@3048.03,1711.61 R22.2@2949.02,1711.61 ; C22.2 3120,1713.58 3127.95,1705.63 SW_F.4 ; C22.2@3074.8,1712.6 3000,1712.6 ; J1.20 3204.72,2964.72 3200,2960 3010,2960 3000,2950 3000,1712.6 ; R22.2@2949.02,1711.61 R22.2 3000,1712.6
KEY_G: C27.2 J1.28 R27.2 SW_G.3 SW_G.4 | length 1959.2
  Bottom Layer w10: J1.28 3362.2,2907.8 3370,2900 3430,2900 3440,2890 3440,2710 3450,2700 3490,2700 3500,2690 3500,1712.6 ; SW_G.3 3423.23,1712.6 R27.2 3500,1712.6 ; SW_G.4 3575.79,1713.58 C27.2 3549.02,1712.6 3500,1712.6
KEY_H: C32.2 J1.36 R32.2 SW_H.3 SW_H.4 | length 2311.9
  Bottom Layer w10: J1.36 3519.69,3000 3520,2999.69 3520,2910 3530,2900 3990,2900 4000,2890 4000,1712.6 ; SW_H.3 3923.23,1712.6 R32.2 4000,1712.6 ; SW_H.4 4075.79,1713.58 C32.2 4049.02,1712.6 4000,1712.6
KEY_I: C35.2 J1.48 R35.2 SW_I.3 SW_I.4 | length 2241.7
  Bottom Layer w10: J1.48 3755.91,3034.09 3770,3020 4530,3020 4540,3010 4540,2170 4548.58,2161.42 SW_I.3 4673.23,2212.6 R35.2 4799.02,2212.6 C35.2 4825.79,2213.58 SW_I.4
KEY_J: C36.2 J1.44 R36.2 SW_J.3 SW_J.4 | length 2653
  Bottom Layer w10: J1.44 3677.17,2992.83 3690,2980 4490,2980 4500,2970 4500,1712.6 ; SW_J.3 4423.23,1712.6 R36.2 4500,1712.6 ; SW_J.4 4575.79,1713.58 C36.2 4549.02,1712.6 4500,1712.6
KEY_K: C40.2 J1.52 R40.2 SW_K.3 SW_K.4 | length 3152.5
  Bottom Layer w10: J1.52 3834.65,3065.35 3840,3060 4990,3060 5000,3050 5000,1712.6 ; SW_K.3 4922.24,1711.61 R40.2@4949.02,1711.61 ; C40.2@5048.03,1711.61 R40.2@4949.02,1711.61 ; C40.2 5125.58,1713.58 5127.95,1711.21 SW_K.4 ; C40.2@5074.8,1712.6 5000,1712.6 ; R40.2@4949.02,1711.61 R40.2 5000,1712.6
KEY_L: C3.2 J1.60 R3.2 SW_L.3 SW_L.4 | length 3329.2
  Bottom Layer w10: J1.60 3992.13,3147.87 4000,3140 5170,3140 5180,3130 5180,3020 5190,3010 5490,3010 5500,3000 5500,1712.6 ; SW_L.3 5423.23,1712.6 R3.2 5500,1712.6 ; SW_L.4 5575.79,1713.58 C3.2 5549.02,1712.6 5500,1712.6
KEY_M: C37.2 J1.46 R37.2 SW_M.3 SW_M.4 | length 3351.5
  Bottom Layer w10: J1.46 3716.54,3013.46 3730,3000 4510,3000 4520,2990 4520,1960 4530,1950 4740,1950 4750,1940 4750,1212.6 ; SW_M.3 4673.23,1212.6 R37.2 4750,1212.6 ; SW_M.4 4825.79,1213.58 C37.2 4799.02,1212.6 4750,1212.6
KEY_N: C33.2 J1.38 R33.2 SW_N.3 SW_N.4 | length 3010.5
  Bottom Layer w10: J1.38 3559.06,2930.94 3570,2920 4010,2920 4020,2910 4020,1960 4030,1950 4240,1950 4250,1940 4250,1212.6 ; SW_N.3 4173.23,1212.6 R33.2 4250,1212.6 ; SW_N.4 4325.79,1213.58 C33.2 4299.02,1212.6 4250,1212.6
KEY_O: C39.2 J1.56 R39.2 SW_O.3 SW_O.4 | length 2588.6
  Bottom Layer w10: J1.56 3913.39,3106.61 3920,3100 5030,3100 5040,3090 5040,2170 5048.58,2161.42 SW_O.3 5173.23,2212.6 R39.2 5299.02,2212.6 C39.2 5325.79,2213.58 SW_O.4
KEY_P: C2.2 J1.62 R2.2 SW_P.3 SW_P.4 | length 3108.1
  Bottom Layer w10: J1.62 4031.5,3168.5 4040,3160 5190,3160 5200,3150 5200,3040 5210,3030 5510,3030 5520,3020 5520,2170 5530,2160 5620.63,2160 SW_P.3 5672.24,2211.61 R2.2@5699.02,2211.61 ; C2.2@5798.03,2211.61 R2.2@5699.02,2211.61 ; C2.2 5870,2213.58 5877.95,2205.63 SW_P.4 ; C2.2@5824.8,2212.6 R2.2 R2.2@5699.02,2211.61
KEY_Q: C1.2 J1.17 R1.2 SW_Q.3 SW_Q.4 | length 3760.1
  Bottom Layer w10: SW_Q.3 1173.23,2212.6 R1.2 1299.02,2212.6 C1.2 1325.79,2213.58 SW_Q.4 1379.37,2160 1450,2160 1460,2170 1460,3050 1470,3060 1480,3060 1490,3070 1490,3280 1500,3290 2630,3290 2640,3300 2640,3660 2650,3670 3130,3670 3145.67,3654.33 J1.17
KEY_R: C16.2 J1.16 R16.2 SW_R.3 SW_R.4 | length 2048.3
  Bottom Layer w10: SW_R.4 2825.79,2213.58 C16.2 2799.02,2212.6 R16.2 2673.23,2212.6 SW_R.3 2548.58,2161.42 2540,2170 2540,2990 2550,3000 3120,3000 3125.98,3005.98 J1.16
KEY_S: C12.2 J1.5 R12.2 SW_S.3 SW_S.4 | length 3025.4
  Bottom Layer w10: SW_S.3 1923.23,1712.6 R12.2 1950.98,1713.58 2000,1713.58 ; SW_S.4 2075.79,1713.58 C12.2 2000,1713.58 ; J1.5 2909.45,3500.55 2900,3510 2770,3510 2760,3500 2760,3130 2750,3120 2430,3120 2420,3110 2420,2950 2410,2940 2030,2940 2020,2930 2020,1960 2000,1940 2000,1713.58
KEY_SELECT: C20.2 J1.57 R20.2 SW_Select.3 SW_Select.4 | length 2847.3
  Bottom Layer w10: J1.57 3933.07,3553.07 3940,3560 4260,3560 4270,3550 4270,3230 4280,3220 5210,3220 5220,3230 5220,3260 5230,3270 5530,3270 5540,3280 5540,3651.42 5550,3661.42 SW_Select.3 5673.23,3712.6 R20.2 5799.02,3712.6 C20.2 5825.79,3713.58 SW_Select.4
KEY_SHIFT: C5.1 J1.15 R5.1 SW_Shift.3 SW_Shift.4 | length 5127.8
  Top Layer w10: v1(1310,1900) 1310,1760 1320,1750 1420,1750 1430,1740 1430,1620 1440,1610 v1(1450,1610)
  Bottom Layer w10: SW_Shift.3 1172.24,1211.61 R5.1@1199.02,1211.61 ; C5.1@1298.03,1211.61 R5.1@1199.02,1211.61 ; v1(1310,1900) 1470,1900 1480,1910 1480,3030 1490,3040 1500,3040 1510,3050 1510,3260 1520,3270 2650,3270 2660,3280 2660,3640 2670,3650 3090,3650 3106.3,3633.7 J1.15 ; SW_Shift.4 1377.95,1202.05 1370,1210 1300.63,1210 1298.03,1212.6 1250,1212.6 ; v1(1450,1610) 1450,1460 1440,1450 1260,1450 1250,1440 1250,1212.6 ; R5.1@1199.02,1211.61 R5.1 1250,1212.6
KEY_SPACE: C30.1 J1.54 R30.2 SW_Space1.3 SW_Space1.4 SW_Space2.3 SW_Space2.4 | length 4222.4
  Bottom Layer w10: J1.54 3874.02,3085.98 3880,3080 5010,3080 5020,3070 5020,1960 5030,1950 5240,1950 5249.02,1940.98 5249.02,1212.6 ; SW_Space1.3 5173.23,1212.6 R30.2 5249.02,1212.6 ; C30.1 5325.79,1213.58 SW_Space1.4 SW_Space2.3 SW_Space2.4 ; C30.1@5324.8,1212.6 5249.02,1212.6
KEY_T: C21.2 J1.24 R21.2 SW_T.3 SW_T.4 | length 1702.6
  Bottom Layer w10: J1.24 3283.46,2933.46 3270,2920 3050,2920 3040,2910 3040,2170 3050,2160 3120.63,2160 SW_T.3 3173.23,2212.6 R21.2 3299.02,2212.6 C21.2 3325.79,2213.58 SW_T.4
KEY_U: C31.2 J1.40 R31.2 SW_U.3 SW_U.4 | length 1900.6
  Bottom Layer w10: J1.40 3598.43,2951.57 3610,2940 4030,2940 4040,2930 4040,2170 4048.58,2161.42 SW_U.3 4173.23,2212.6 R31.2 4299.02,2212.6 C31.2 4325.79,2213.58 SW_U.4
KEY_UP: C10.2 J1.23 R10.2 SW_Up.3 SW_Up.4 | length 3225.2
  Bottom Layer w10: SW_Up.3@1122.05,3658.82 1123.35,3660.12 1173.23,3710 1299.02,3710 1300,3710.98 1325.79,3710.98 1376.65,3660.12 SW_Up.4@1377.95,3658.82 ; R10.2 1200.98,3713.58 C10.2 ; SW_Up.4 SW_Up.4@1377.95,3658.82 ; J1.23 3263.78,3716.22 3250,3730 2590,3730 2580,3720 2580,3360 2570,3350 1460,3350 1450,3360 1450,3395 1445,3400 1405,3400 1400,3405 1400,3570 1395,3575 1385,3575 1377.95,3582.05 SW_Up.4@1377.95,3658.82
KEY_V: C23.2 J1.22 R23.2 SW_V.3 SW_V.4 | length 2771.3
  Bottom Layer w10: SW_V.3 3173.23,1212.6 R23.2 3249.51,1212.6 ; J1.22 3244.09,2954.09 3230,2940 3030,2940 3020,2930 3020,1960 3030,1950 3239.51,1950 3249.51,1940 3249.51,1212.6 ; SW_V.4 3325.79,1213.58 C23.2 3299.02,1212.6 3249.51,1212.6
KEY_W: C6.2 J1.9 R6.2 SW_W.3 SW_W.4 | length 3436.3
  Bottom Layer w10: C6.2@1798.03,2211.61 R6.2@1699.02,2211.61 ; C6.2 1870,2213.58 1877.95,2205.63 SW_W.4 ; C6.2@1824.8,2212.6 R6.2 R6.2@1699.02,2211.61 ; J1.9 2988.19,3541.81 2980,3550 2730,3550 2720,3540 2720,3170 2710,3160 2390,3160 2380,3150 2380,2990 2370,2980 1550,2980 1540,2970 1540,2170 1550,2160 1620.63,2160 SW_W.3 1672.24,2211.61 R6.2@1699.02,2211.61
KEY_X: C13.2 J1.6 R13.2 SW_X.3 SW_X.4 | length 3408
  Bottom Layer w10: SW_X.3 2173.23,1212.6 R13.2 2250,1212.6 ; SW_X.4 2325.79,1213.58 C13.2 2299.02,1212.6 2250,1212.6 ; J1.6 2929.13,3109.13 2920,3100 2450,3100 2440,3090 2440,2930 2430,2920 2050,2920 2040,2910 2040,1950 2050,1940 2240,1940 2250,1930 2250,1212.6
KEY_Y: C26.2 J1.32 R26.2 SW_Y.3 SW_Y.4 | length 1548.7
  Bottom Layer w10: J1.32 3440.94,2990.94 3440,2990 3440,2950 3450,2940 3470,2940 3480,2930 3480,2750 3490,2740 3530,2740 3540,2730 3540,2170 3548.58,2161.42 SW_Y.3 3673.23,2212.6 R26.2 3799.02,2212.6 C26.2 3825.79,2213.58 SW_Y.4
KEY_Z: C8.2 J1.11 R8.2 SW_Z.3 SW_Z.4 | length 4475.1
  Bottom Layer w10: SW_Z.3 1673.23,1212.6 R8.2 1749.51,1212.6 ; SW_Z.4 1825.79,1213.58 C8.2 1799.02,1212.6 1749.51,1212.6 ; J1.11 3027.56,3562.44 3020,3570 2710,3570 2700,3560 2700,3190 2690,3180 2370,3180 2360,3170 2360,3010 2350,3000 1530,3000 1520,2990 1520,1960 1530,1950 1739.51,1950 1749.51,1940 1749.51,1212.6
NetC46_2: C46.2 R43.2 R45.1 U3.3 | length 279.5
  Bottom Layer w20: R45.1 U3.3 2000,3740.16 2000,3812.6 ; R43.2 2000,3812.6 ; C46.2 2049.02,3812.6 2000,3812.6
NetC48_2: C48.2 R44.2 | length 100.4
  Bottom Layer w20: C48.2 1999.02,3513.58 R44.2
NetD1_2: D1.2 L1.2 R44.1 U3.1 | length 363.6
  Bottom Layer w20: U3.1 1962.6,3662.6 1950,3650 1950,3600 1962.6,3587.4 R44.1 2000.98,3586.42 D1.2 L1.2
OLED_BS0_3V3: J1.51 U2.4 | length 1017.9
  Bottom Layer w10: J1.51 3814.96,3604.96 3830,3620 4600,3620 4611.77,3608.23 U2.4
OLED_BS0_5V: DS1.17 U2.17 | length 2303.4
  Top Layer w10: DS1.17 2850,3550 2860,3540 4590,3540 4600,3530 v1(4600,3420)
  Bottom Layer w10: v1(4600,3420) 4600,3391.11 4611.77,3379.34 U2.17
OLED_BS1_3V3: J1.55 U2.3 | length 1064.8
  Bottom Layer w10: J1.55 3893.7,3563.7 3910,3580 4460,3580 4470,3570 4470,3450 4480,3440 4580,3440 4586.18,3446.18 U2.3
OLED_BS1_5V: DS1.18 U2.18 | length 2375.2
  Top Layer w10: DS1.18 2750,3530 2760,3520 4560,3520 4570,3510 v1(4570,3400)
  Bottom Layer w10: v1(4570,3400) 4570,3392.83 4586.18,3376.64 U2.18
OLED_BS2_3V3: J1.53 U2.1 | length 865.3
  Bottom Layer w10: J1.53 3854.33,3584.33 3870,3600 4530,3600 4535,3595 U2.1
OLED_BS2_5V: DS1.19 U2.20 | length 2430.6
  Top Layer w10: DS1.19 2650,3510 2660,3500 4520,3500 4535,3485 v1(4535,3390)
  Bottom Layer w10: U2.20 v1(4535,3390)
OLED_CS_3V3: J1.47 U2.6 | length 1227.8
  Bottom Layer w10: J1.47 3736.22,3646.22 3750,3660 4650,3660 4662.95,3647.05 U2.6
OLED_CS_5V: DS1.15 U2.15 | length 2159.7
  Top Layer w10: DS1.15 3050,3590 3060,3580 4650,3580 4660,3570 v1(4660,3430)
  Bottom Layer w10: v1(4660,3430) 4662.95,3427.05 U2.15
OLED_DB0_3V3: J1.31 U1.6 | length 2265.7
  Bottom Layer w10: J1.31 3421.26,3811.26 3430,3820 5050,3820 5062.95,3807.05 U1.6
OLED_DB0_5V: DS1.7 U1.15 | length 1759.7
  Top Layer w10: DS1.7 3850,3750 3860,3740 5050,3740 5060,3730 v1(5060,3420)
  Bottom Layer w10: v1(5060,3420) 5062.95,3417.05 U1.15
OLED_DB1_3V3: J1.33 U1.5 | length 2163.7
  Bottom Layer w10: J1.33 3460.63,3790.63 3470,3800 5030,3800 5037.36,3792.64 U1.5
OLED_DB1_5V: DS1.8 U1.16 | length 1831.6
  Top Layer w10: DS1.8 3750,3730 3760,3720 5020,3720 5030,3710 v1(5030,3460)
  Bottom Layer w10: v1(5030,3460) 5030,3400 5037.36,3392.64 U1.16
OLED_DB2_3V3: J1.35 U1.4 | length 2055.8
  Bottom Layer w10: J1.35 3500,3770 3510,3780 5000,3780 5011.77,3768.23 U1.4
OLED_DB2_5V: DS1.9 U1.17 | length 1903.4
  Top Layer w10: DS1.9 3650,3710 3660,3700 4990,3700 5000,3690 v1(5000,3430)
  Bottom Layer w10: v1(5000,3430) 5010,3420 5010,3341.54 U1.17
OLED_DB3_3V3: J1.37 U1.3 | length 1953.7
  Bottom Layer w10: J1.37 3539.37,3749.37 3550,3760 4980,3760 4986.18,3753.82 U1.3
OLED_DB3_5V: DS1.10 U1.18 | length 1975.2
  Top Layer w10: DS1.10 3550,3690 3560,3680 4960,3680 4970,3670 v1(4970,3450)
  Bottom Layer w10: v1(4970,3450) 4970,3410 4986.18,3393.82 U1.18
OLED_DB4_3V3: J1.39 U1.1 | length 1823.5
  Bottom Layer w10: J1.39 3578.74,3728.74 3590,3740 4930,3740 4935,3735 U1.1
OLED_DB4_5V: DS1.11 U1.20 | length 2040.6
  Top Layer w10: DS1.11 3450,3670 3460,3660 4930,3660 4940,3650 v1(4940,3410)
  Bottom Layer w10: U1.20 4935,3405 v1(4940,3410)
OLED_DB5_3V3: J1.41 U2.9 | length 1545.9
  Bottom Layer w10: J1.41 3618.11,3708.11 3630,3720 4730,3720 4740,3710 4740,3620.28 4739.72,3620 U2.9
OLED_DB5_5V: DS1.12 U2.12 | length 1952.8
  Top Layer w10: DS1.12 3350,3650 3360,3640 4740,3640 4750,3630 4750,3410 v1(4740,3400)
  Bottom Layer w10: U2.12 4739.72,3399.72 v1(4740,3400)
OLED_DB6_3V3: J1.43 U2.8 | length 1437.8
  Bottom Layer w10: J1.43 3657.48,3687.48 3670,3700 4700,3700 4714.13,3685.87 U2.8
OLED_DB6_5V: DS1.13 U2.13 | length 2022.3
  Top Layer w10: DS1.13 3250,3630 3260,3620 4710,3620 4720,3610 v1(4720,3430)
  Bottom Layer w10: U2.13 4712.5,3341.4 4712.5,3422.5 v1(4720,3430)
OLED_DB7_3V3: J1.45 U2.7 | length 1335.7
  Bottom Layer w10: J1.45@3696.85,3443.01 3696.85,3666.85 3710,3680 4680,3680 4688.54,3671.46 U2.7
OLED_DB7_5V: DS1.14 U2.14 | length 2089.1
  Top Layer w10: DS1.14 3150,3610 3160,3600 4680,3600 4690,3590 v1(4690,3450)
  Bottom Layer w10: U2.14 4688.54,3448.54 v1(4690,3450)
OLED_DC_3V3: J1.25 U1.9 | length 2743.8
  Top Layer w10: v1(3303.15,3440) 3303.15,3473.15 3310,3480 4440,3480 4450,3470 v1(4450,3400) ; v1(5260,3350) v1(5260,3630)
  Bottom Layer w10: J1.25@3300,3440 v1(3303.15,3440) 3303.98,3440 3306.99,3443.01 J1.25@3303.15,3443.01 ; v1(4450,3400) 4450,3270 4460,3260 5170,3260 5180,3270 5180,3290 5200,3310 5250,3310 5260,3320 v1(5260,3350) ; U1.9 5139.72,3619.72 5150,3630 v1(5260,3630)
OLED_DC_5V: DS1.4 U1.12 | length 1538.2
  Top Layer w10: DS1.4 4150,3810 4160,3800 5140,3800 5150,3790 5150,3410
  Bottom Layer w10: U1.12 v1(5139.72,3399.72)
OLED_E_3V3: J1.29 U1.7 | length 2373.7
  Bottom Layer w10: J1.29 3381.89,3831.89 3390,3840 5080,3840 5088.54,3831.46 U1.7
OLED_E_5V: DS1.6 U1.14 | length 1687.1
  Top Layer w10: DS1.6 3950,3770 3960,3760 5080,3760 5090,3750 v1@5090,3460
  Bottom Layer w10: U1.14 v1(5088.54,3458.54)
OLED_RES_3V3: J1.49 U2.5 | length 1125.8
  Bottom Layer w10: J1.49 3775.59,3625.59 3790,3640 4630,3640 4637.36,3632.64 U2.5
OLED_RES_5V: DS1.16 U2.16 | length 2231.6
  Top Layer w10: DS1.16 2950,3570 2960,3560 4620,3560 4630,3550 v1(4630,3400)
  Bottom Layer w10: v1(4630,3400) 4637.36,3392.64 U2.16
OLED_RW_3V3: J1.27 U1.8 | length 2918.7
  Top Layer w10: v1(3342.52,3440) 3342.52,3452.52 3350,3460 4390,3460 4400,3450 v1(4400,3400) ; v1(5300,3350) v1(5300,3680)
  Bottom Layer w10: J1.27@3340,3440 v1(3342.52,3440) 3343.98,3440 3346.99,3443.01 J1.27 ; v1(4400,3400) 4400,3250 4410,3240 5190,3240 5200,3250 5200,3280 5210,3290 5290,3290 5300,3300 v1(5300,3350) ; U1.8 5114.13,3674.13 5120,3680 v1(5300,3680)
OLED_RW_5V: DS1.5 U1.13 | length 1622.5
  Top Layer w10: DS1.5 4050,3790 4060,3780 5110,3780 5120,3770 v1(5120,3430)
  Bottom Layer w10: U1.13 5112.22,3341.67 5112.22,3422.22 v1(5120,3430)
pads on no net: J1.AH1 J1.AH2
copper on no net: | length 4862.7
  Top Layer w10: 1510,3650 1600,3650 ; 5760,1925 5850,1925 ; 1600,3650 1500,3650 1600,3650 ; 5850,1925 5750,1925 5850,1925 ; 1450,3650 1550,3650 1650,3650 1650,3750 1550,3750 1450,3750 1450,3650 ; 1500,3750 1600,3750 1500,3750 ; 5700,1925 5800,1925 5900,1925 5900,2025 5800,2025 5700,2025 5700,1925 ; 5750,2025 5850,2025 5750,2025
  Top Layer w50: 1570,3700 ccw(c1550,3700) 1570,3700 ; 5820,1975 ccw(c5800,1975) 5820,1975
  Bottom Layer w10: 1510,3650 1600,3650 ; 5760,1925 5850,1925 ; 1600,3650 1500,3650 1600,3650 ; 5850,1925 5750,1925 5850,1925 ; 1450,3650 1550,3650 1650,3650 1650,3750 1550,3750 1450,3750 1450,3650 ; 1500,3750 1600,3750 1500,3750 ; 5700,1925 5800,1925 5900,1925 5900,2025 5800,2025 5700,2025 5700,1925 ; 5750,2025 5850,2025 5750,2025
  Bottom Layer w50: 1570,3700 ccw(c1550,3700) 1570,3700 ; 5820,1975 ccw(c5800,1975) 5820,1975

## Polygon pours and split planes (outlines as drawn)
GND on Top Layer "TopGND" (solid, remove dead copper, pour order 0): 1050,3950 5950,3950 5950,1050 1050,1050 1050,3950
GND on Bottom Layer "BottomGND" (solid, remove dead copper, pour order 2): 1050,3950 5950,3950 5950,1050 1050,1050 1050,3950

## Keep-outs
Keep-Out Layer:
  lines w10: 1030,3900 1040,3890 1040,1110 1050,1100 ccw(c1100,1100) 1100,1050 5900,1050 ccw(c5900,1100) 5950,1100 ; 1050,3900 cw(c1100,3900) 1100,3950 5900,3950 ; 1490,3640 1660,3640 1660,3760 1490,3760 ; 1610,3640 1440,3640 1440,3760 1610,3760 ; 5740,1915 5910,1915 5910,2035 5740,2035 ; 5860,1915 5690,1915 5690,2035 5860,2035 ; 5910,3960 cw(c5910,3910) 5960,3910 ; 5960,1100 5960,3900

## Other copper
Top Layer:
  text "1" at 1475,3680 h40
  text "1" at 5725,1955 h40
Bottom Layer:
  text "2" at 1605,3680 h40
  text "2" at 5855,1955 h40

## Silkscreen, mask and mechanical layers (free items; w line width, h text height)
Top Overlay:
  lines w10: 1510,3650 1600,3650 ; 5760,1925 5850,1925 ; 1600,3650 1500,3650 1600,3650 ; 5850,1925 5750,1925 5850,1925 ; 1450,3650 1550,3650 1650,3650 1650,3750 1550,3750 1450,3750 1450,3650 ; 1500,3750 1600,3750 1500,3750 ; 5700,1925 5800,1925 5900,1925 5900,2025 5800,2025 5700,2025 5700,1925 ; 5750,2025 5850,2025 5750,2025
Bottom Overlay:
  lines w10: 1510,3650 1600,3650 ; 5760,1925 5850,1925 ; 1600,3650 1500,3650 1600,3650 ; 5850,1925 5750,1925 5850,1925 ; 1450,3650 1550,3650 1650,3650 1650,3750 1550,3750 1450,3750 1450,3650 ; 1500,3750 1600,3750 1500,3750 ; 5700,1925 5800,1925 5900,1925 5900,2025 5800,2025 5700,2025 5700,1925 ; 5750,2025 5850,2025 5750,2025
  text "Alphanumeric + Navigation Keypad & 2x20 Character OLED Panel" at 5200,3760 h40
  text "Andrew Hennessy <ajb200@case.edu>, 27 March 2016, Version 1.0" at 5200,3700 h40
Top Solder:
  circle w10: c5800,1975 r30
  circle w10: c5800,1975 r5
  circle w10: c1550,3700 r30
  circle w10: c1550,3700 r5
Bottom Solder:
  circle w10: c5800,1975 r30
  circle w10: c5800,1975 r5
  circle w10: c1550,3700 r30
  circle w10: c1550,3700 r5
Mechanical 11:
  the board outline again, w0.01

## Dimensions
1050,4000 to 1050,1000 on Mechanical 1
1000,1050 to 6000,1050 on Mechanical 1

## Text inside footprints (layer, text, board x,y; h text height)
DS1: Mechanical 1 "2x20 Text Goes Here" at 2950,3450 h60